# Altium PCB FAN_MOTOR_PCB.PcbDoc
Units mil, origin at the board's own origin, x right, y up, seen from the top; angles counter-clockwise.
Board outline 1140 x 1745 mil, 2 copper layers (Top Layer, Bottom Layer); 26 components, 13 nets, 79 pads, 93 vias.
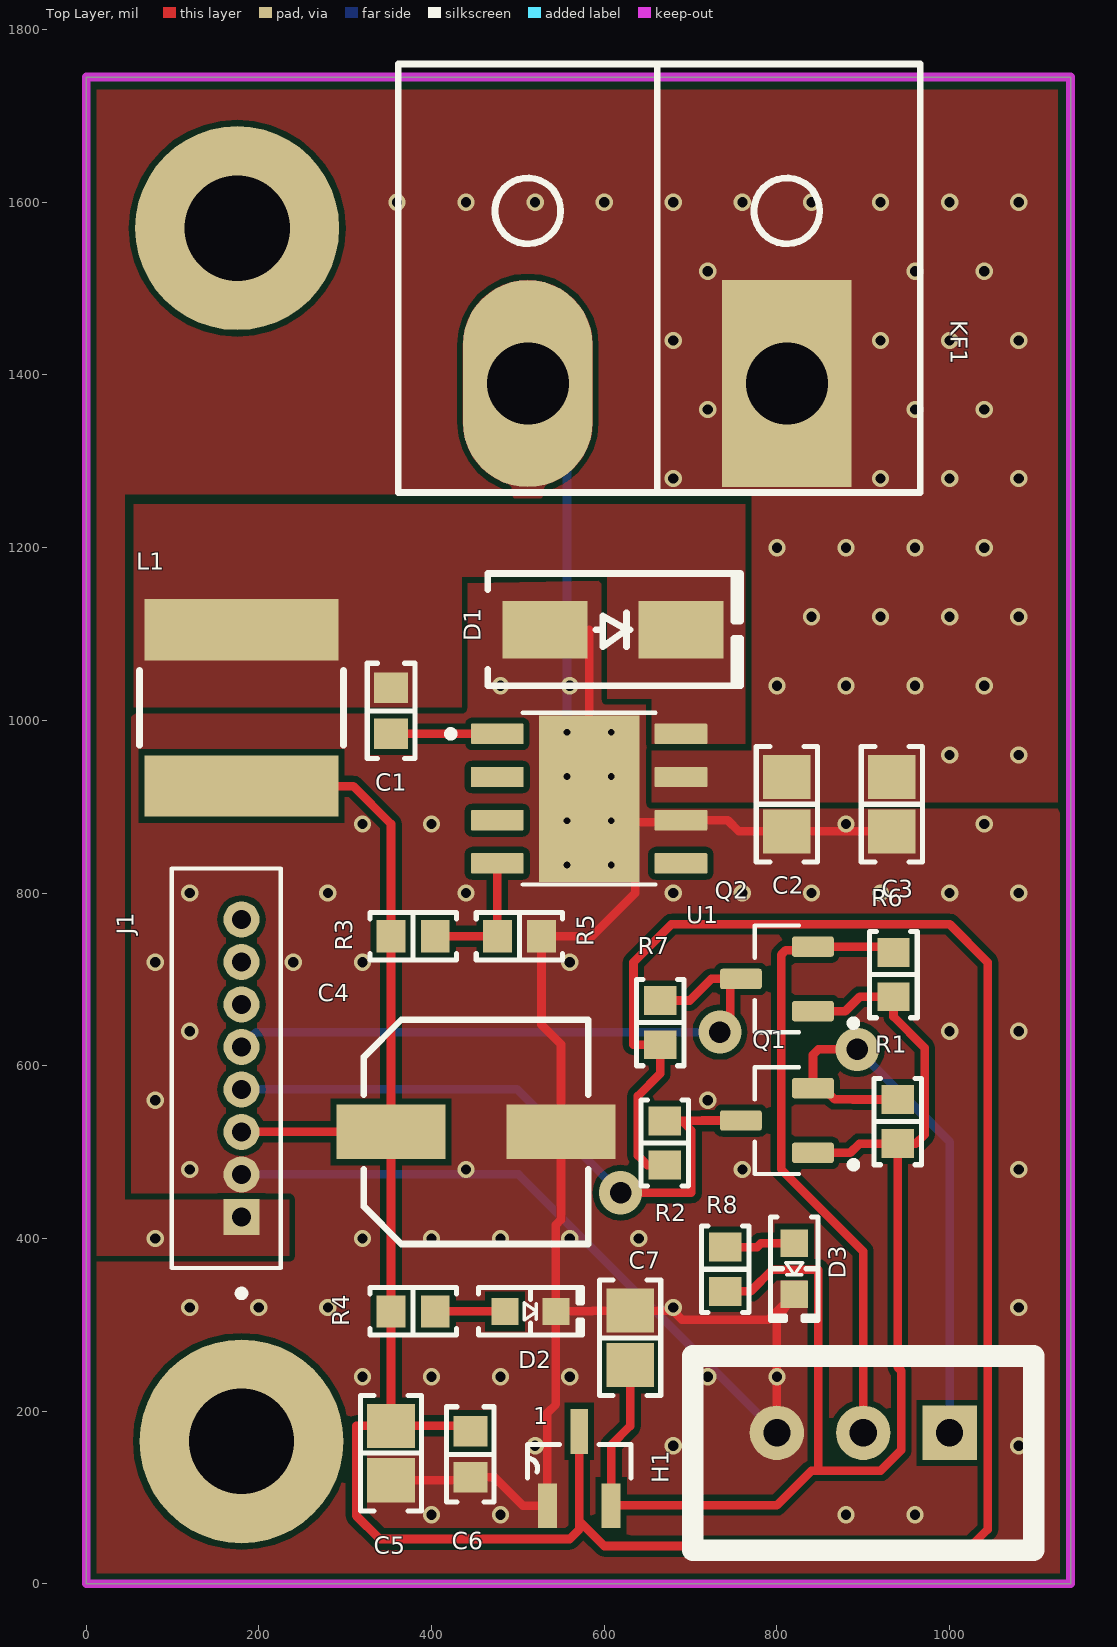
[diagram p0: Top Layer view]
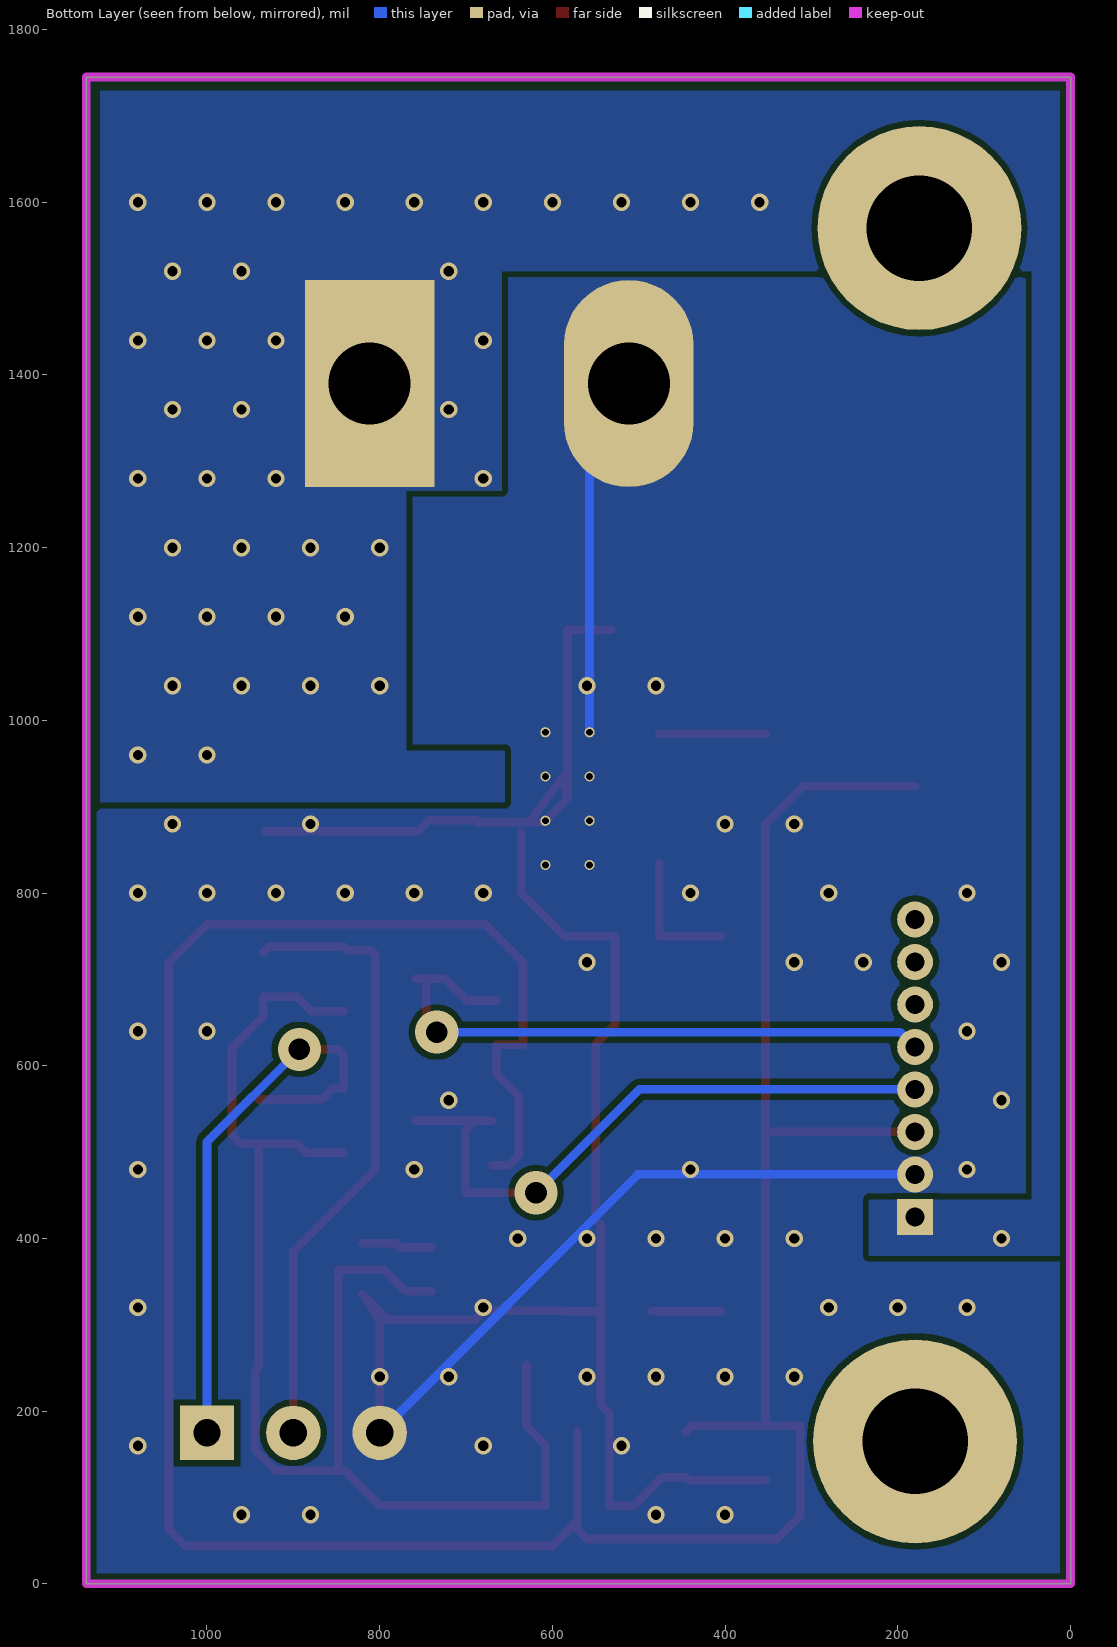
[diagram p1: Bottom Layer view, seen from below]
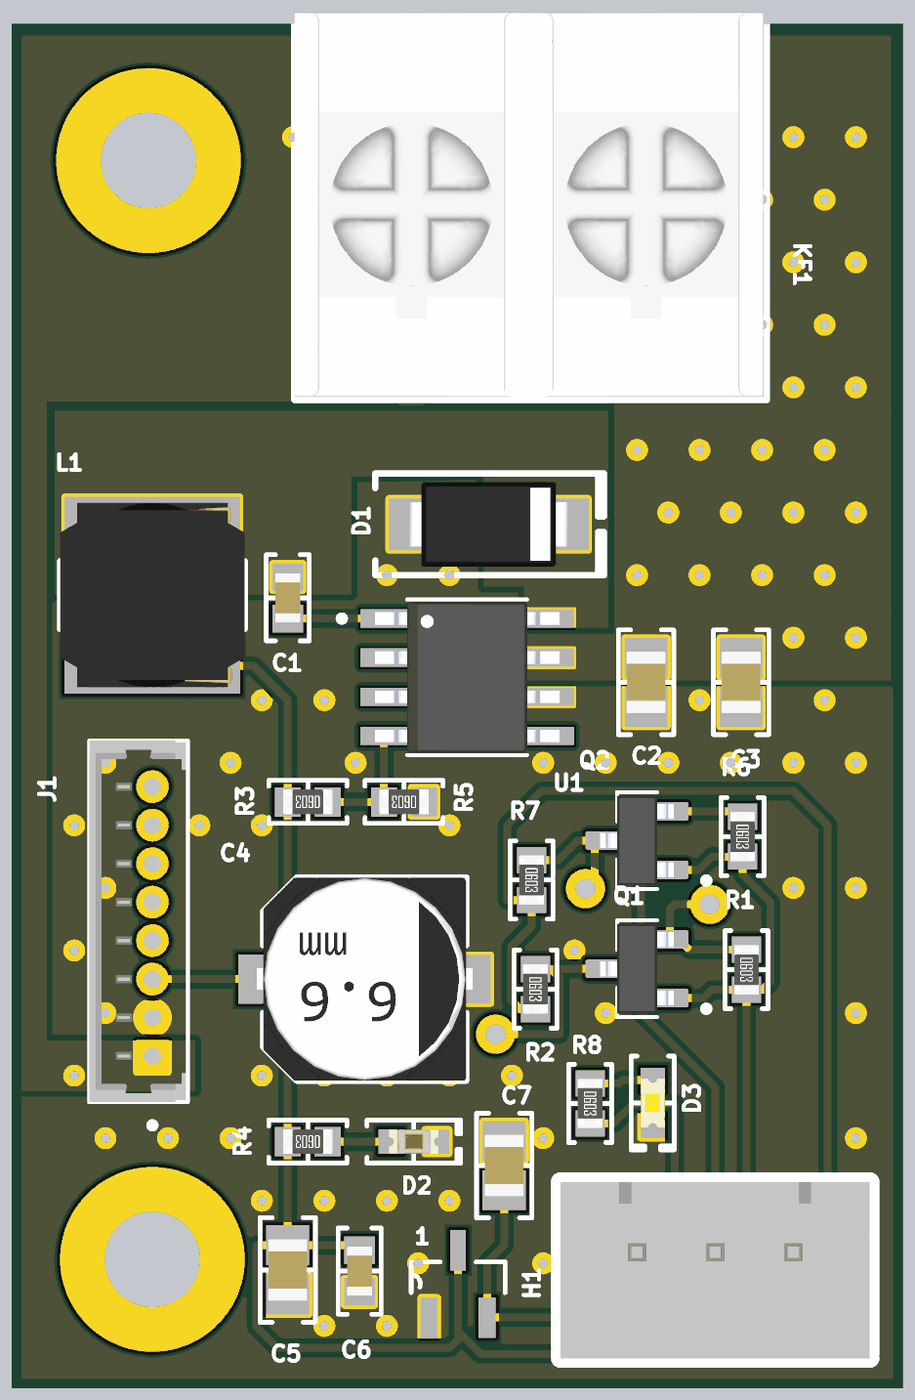
[diagram p2: 3D render of the assembled board from above, using the file's embedded part models]

## Layer stack, top to bottom
Top Solder: solder mask 0.4, Solder Resist, Dk 3.5
Top Layer: signal copper 1.4
Dielectric 1: dielectric 12.6, FR-4, Dk 4.8
Bottom Layer: signal copper 1.4
Bottom Solder: solder mask 0.4, Solder Resist, Dk 3.5

## Board outline
0,0 1140,0 1140,1745 0,1745

## Design rules (kind name [scope] priority, off if disabled: settings)
Clearance [All] p1: gap=7 ignorepadtopadclearanceinfootprint=FALSE
PolygonConnect PolygonConnect_4 [All vs IsNamedPolygon('GND_L01_P005') Or IsNamedPolygon('GND_L02_P006')] p1: connectstyle=Direct reliefconductorwidth=10 reliefentries=4 polygonreliefangle="90 Angle" airgapwidth=10
PolygonConnect PolygonConnect_3 [All vs IsNamedPolygon('NETC1_1_L01_P004')] p2: connectstyle=Direct reliefconductorwidth=10 reliefentries=4 polygonreliefangle="90 Angle" airgapwidth=10
PolygonConnect PolygonConnect_2 [All vs IsNamedPolygon('+25_L02_P002') Or IsNamedPolygon('+25_L02_P003')] p3: connectstyle=Direct reliefconductorwidth=10 reliefentries=4 polygonreliefangle="90 Angle" airgapwidth=10
PolygonConnect PolygonConnect_1 [All vs IsNamedPolygon('+25_L01_P000') Or IsNamedPolygon('+25_L01_P001')] p4: connectstyle=Direct reliefconductorwidth=10 reliefentries=4 polygonreliefangle="90 Angle" airgapwidth=10
PolygonConnect [All] p5: connectstyle=Relief reliefconductorwidth=10 reliefentries=4 polygonreliefangle="90 Angle" airgapwidth=10
RoutingVias [All] p1: holewidth=25 width=50 viastyle="Through Hole" minholewidth=10 minwidth=20 maxholewidth=28 maxwidth=50
SolderMaskExpansion [All] p1: expansion=4 istentingtop=FALSE
Width [All] p1: maxlimit=10 minlimit=10 preferedwidth=10
30 further rules are at their usual default settings.

## Components (designator, comment, footprint, x,y, rotation, side; value= is the part's Value field where it differs from the comment)
1 "MCP1700T-3302E/TT" SOT95P237X112-3N 571.15,133.57 r90 top
C1 "10000 pF" "CAP 0603_1608" 353.15,1010.98 r270 top
C2 "4.7 µF" "CAP 0805_2012" 811.53,902.91 r90 top
C3 "4.7 µF" "CAP 0805_2012" 933.15,902.91 r90 top
C4 "220 µF" "CAP ALSMD 6.6MM H6.1MM" 451.57,523.43 r0 top
C5 "10 µF" "CAP 0805_2012" 353.15,151.5 r90 top
C6 "0.1µF" "CAP 0603_1608" 445,150 r90 top
C7 "10 µF" "CAP 0805_2012" 630,285 r270 top
D1 "SS34-HF" "DO214AC SMA" 610.12,1105 r0 top
D2 "Red" "LED 0603_1608 RED" 514.53,315.59 r0 top
D3 "Yellow" "LED 0603_1608 YELLOW" 820,365 r270 top
H1 "Header 3P 2.54 Duc Thang" XH2.54M-3 1000,175 r180 top
J1 "0530470810" MOLEX_0530470810 162.28,597.24 r90 top
KF1 "CON 2 KF7.62" "CON 2 KF7.62" 809.53,1390 r180 top
L1 "22 µH" "WURTH WE-LQS 6045" 180,1014.45 r270 top
Q1 "BSS138" SOT95P240X111-3N 800,536.61 r180 top
Q2 "BSS138" SOT95P240X111-3N 800,700.59 r180 top
R1 "10 kOhms" "RES 0603_1608" 940,535.43 r270 top
R2 "10 kOhms" "RES 0603_1608" 670,510.59 r270 top
R3 "10.2 kOhms" "RES 0603_1608" 378.74,750 r180 top
R4 "680 Ohms" "RES 0603_1608" 378.74,315.59 r180 top
R5 "3.3 kOhms" "RES 0603_1608" 501.85,750 r180 top
R6 "10 kOhms" "RES 0603_1608" 935,705.59 r270 top
R7 "10 kOhms" "RES 0603_1608" 665,650 r270 top
R8 "680 Ohms" "RES 0603_1608" 740,364.41 r270 top
U1 "TPS5430DDAR" CONV_TPS5430DDAR 582.56,909.41 r0 top

## Footprints (in the part's own frame and the unit in brackets; to place one, negate y for a bottom-side part, rotate by r counter-clockwise, add the part's x,y. Pads: shape width x height; smd on the part's side, far side on the other; paste and mask are expansions set on the pad)
"CAP 0603_1608" [mm] "Chip Capacitor, 2-Leads, Body 1.60x0.80mm, IPC Medium Density"
  rect 0.9x1 smd: 1(-0.675,0) 2(0.675,0)
  silkscreen extent -1.4,-0.7 1.4,0.7, body extent -0.8,-0.41 0.8,0.41, height 0.82
"CAP 0805_2012" [mm] "Chip Capacitor, 2-Leads, Body 2.00x1.20mm, IPC Medium Density"
  rect 1.3x1.4 smd: 1(-0.8,0) 2(0.8,0)
  silkscreen extent -1.7,-0.9 1.7,0.9, body extent -1,-0.64 1,0.64, height 1.26
"CAP ALSMD 6.6MM H6.1MM" [mm] "Aluminum Electrolytic Capacitor, Body 6.60x6.60x6.10mm, IPC Low Density"
  rect 3.2x1.6 smd: 1(-2.5,0) 2(2.5,0)
  silkscreen extent -3.3,-3.3 3.3,3.3, body extent -3.5,-3.3 3.5,3.3, height 6.1
"CON 2 KF7.62" [mil]
  rect 150x240 hole 95: 1(-2,0)
  oval 150x240 hole 95: 2(298,0)
  silkscreen extent -157,-370 448,126, body extent -152,-370 448,122, height 493
CONV_TPS5430DDAR [mm]
  rrect10% 1.55x0.6 smd mask+0: 1(-2.7,1.905) 2(-2.7,0.635) 3(-2.7,-0.635) 4(-2.7,-1.905) 5(2.7,-1.905) 6(2.7,-0.635) 7(2.7,0.635) 8(2.7,1.905)
  rect 2.95x4.9 smd paste-3 mask+0: 9(0,0)
  round 0.3 hole 0.2 mask+0: 10(-0.65,1.95) 11(0.65,1.95) 12(-0.65,0.65) 13(0.65,0.65) 14(-0.65,-0.65) 15(0.65,-0.65) 16(-0.65,-1.95) 17(0.65,-1.95)
  silkscreen extent -4.17,-2.52 1.95,2.52, body extent -3,-2.45 3,2.45, height 1.7
"DO214AC SMA" [mm] "Molded Diode, 2-Leads, Body 4.30x2.60mm, IPC Medium Density"
  rect 2.5x1.7 smd: 1(-2,0) 2(2,0)
  silkscreen extent -3.68,-1.65 3.75,1.65, body extent -2.6,-1.37 2.6,1.37, height 2.4
"LED 0603_1608 RED" [mm] "Chip Diode, 2-Leads, Body 1.60x0.80mm, IPC Medium Density"
  rect 0.8x0.8 smd: 1(-0.75,0) 2(0.75,0)
  silkscreen extent -1.52,-0.7 1.52,0.7, body extent -0.8,-0.4 0.8,0.4, height 0.53
"LED 0603_1608 YELLOW" [mm] "Chip Diode, 2-Leads, Body 1.60x0.80mm, IPC Medium Density"
  rect 0.8x0.8 smd: 1(-0.75,0) 2(0.75,0)
  silkscreen extent -1.52,-0.7 1.52,0.7, body extent -0.8,-0.4 0.8,0.4, height 0.53
MOLEX_0530470810 [mm]
  rect 1.058x1.058 hole 0.55: 1(-4.375,-0.45)
  round 1.058 hole 0.55: 2(-3.125,-0.45) 3(-1.875,-0.45) 4(-0.625,-0.45) 5(0.625,-0.45) 6(1.875,-0.45) 7(3.125,-0.45) 8(4.375,-0.45)
  silkscreen extent -6.72,-1.6 5.88,1.6, body extent -5.87,-1.6 5.87,1.6, height 0.97
"RES 0603_1608" [mm] "Chip Resistor, 2-Leads, Body 1.60x0.80mm, IPC Medium Density"
  rect 0.85x0.95 smd: 1(-0.65,0) 2(0.65,0)
  silkscreen extent -1.27,-0.7 1.27,0.7, body extent -0.8,-0.4 0.8,0.4, height 0.45
SOT95P237X112-3N [mil]
  rect 52x22 smd: 1(-43,37) 2(-43,-37)
  rect 52x20 smd: 3(43,0)
  silkscreen extent -11,-60 28,60
SOT95P240X111-3N [mm]
  rrect25% 1.23x0.6 smd: 1(-1.06,0.95) 2(-1.06,-0.95) 3(1.06,0)
  silkscreen extent -2.35,-1.57 0.65,1.57, body extent -1.2,-1.46 1.2,1.46, height 1.2
"WURTH WE-LQS 6045" [mm] "SMD Power Inductor, 2-Leads, body 6x6mm"
  rect 1.8x5.7 smd: 1(-2.3,0) 2(2.3,0)
  silkscreen extent -1.1,-3 1.1,3, body extent -3,-3 3,3, height 4.5
XH2.54M-3 [mm]
  rect 1.6x1.6 hole 0.8: 1(0,0)
  round 1.6 hole 0.8: 2(2.54,0) 3(5.08,0)
  silkscreen extent -2.48,-2.26 7.56,3.46, body extent -2.48,-2.26 7.56,3.48, height 6.91

## Part data
1: "Linear Voltage Regulator IC 1 Output 250mA SOT-23-3", Package="SOT-23-3 Microchip", Availability=Unavailable, MF=Microchip, MP=MCP1700T-3302E/TT, Price=None, SnapEDA_Link=https://www.snapeda.com/parts/MCP1700T-3302E/TT/Microchip/view-part/50877/?ref=snap
C1: library part C0603C103K4RECAUTO, "CAP CER 0603 10NF 16V X7R 10%", Device Package="0603 (1608 Metric)", Manufacturer=KEMET, Operating Temperature="-55°C ~ 125°C", Ratings=AEC-Q200, Supplier Part Number 1=399-17880-1-ND, Temperature Coefficient=X7R, Tolerance=±10%, Voltage - Rated=16V, Applications="Automotive, ESD Protection", Capacitance="10000 pF", componentlink1description=Datasheet, componentlink1url=https://api.kemet.com/component-edge/download/datasheet/C0603C103K4RECAUTO.pdf, componentlink2description="DigiKey Link", componentlink2url=https://www.digikey.com/en/products/detail/kemet/C0603C103K4RECAUTO/8640474, lastupdated="2/9/2024 8:10:22 PM", Lifecycle Status=Active, Minimum Order=1, Mounting Type="Surface Mount, MLCC", Package / Case="0603 (1608 Metric)", packaging=TapeAndReel, Part Number=C0603C103K4RECAUTO, Part Status=Active, partid=8251, Price=0.01, series="ESD SMD Auto X7R", Size / Dimension="0.063\" L x 0.031\" W (1.60mm x 0.80mm)", Supplier 1=DigiKey, Thickness (Max)="0.034\" (0.87mm)"
C2 C3: library part KGM21AR71E475KU, "CAP CER 4.7UF 25V X7R 0805", Device Package="0805 (2012 Metric)", Manufacturer="KYOCERA AVX", Operating Temperature="-55°C ~ 125°C", Supplier Part Number 1=478-KGM21AR71E475KUCT-ND, Temperature Coefficient=X7R, Tolerance=±10%, Voltage - Rated=25V, Applications="General Purpose", Capacitance="4.7 µF", componentlink1description=Datasheet, componentlink1url=https://datasheets.kyocera-avx.com/X7RDielectric.pdf, componentlink2description="DigiKey Link", componentlink2url=https://www.digikey.com/en/products/detail/kyocera-avx/KGM21AR71E475KU/6564250, lastupdated="2/9/2024 8:14:06 PM", Lifecycle Status=Active, Minimum Order=1, Mounting Type="Surface Mount, MLCC", Package / Case="0805 (2012 Metric)", packaging=TapeAndReel, Part Number=KGM21AR71E475KU, Part Status=Active, partid=53884, Price=0.12, series="KGM - X7R", Size / Dimension="0.079\" L x 0.049\" W (2.01mm x 1.25mm)", Supplier 1=DigiKey, Thickness (Max)="0.057\" (1.45mm)"
C4: library part EEE-FT1A221AL, "CAP ALUM 220UF 20% 10V SMD", ESR (Equivalent Series Resistance)="260mOhm @ 100kHz", Lifetime @ Temp.="2000 Hrs @ 105°C", Manufacturer="Panasonic Electronic Components", Operating Temperature="-55°C ~ 105°C", Ratings=AEC-Q200, Ripple Current @ High Frequency="300 mA @ 100 kHz", Ripple Current @ Low Frequency="195 mA @ 120 Hz", Supplier Part Number 1=10-EEE-FT1A221ALCT-ND, Tolerance=±20%, Voltage - Rated="10 V", Applications=Automotive, Capacitance="220 µF", componentlink1description=Datasheet, componentlink1url=https://na.industrial.panasonic.com/file-download/19625, componentlink2description="DigiKey Link", componentlink2url=https://www.digikey.com/en/products/detail/panasonic-electronic-components/EEE-FT1A221AL/12459675, Height - Seated (Max)="0.240\" (6.10mm)", lastupdated="6/3/2024 8:16:08 PM", Lifecycle Status=Active, Minimum Order=1, Mounting Type="Surface Mount", packaging=TapeAndReel, Part Number=EEE-FT1A221AL, Part Status=Active, partid=27865, Polarization=Polar, Price=0.16, series="FT, Halogen Free", Size / Dimension="0.248\" Dia (6.30mm)", Supplier 1=DigiKey, Surface Mount Land Size="0.260\" L x 0.260\" W (6.60mm x 6.60mm)"
C5 C7: library part C2012X6S1C106K125AC, "CAP CER 10UF 16V X6S 0805", Device Package="0805 (2012 Metric)", Manufacturer="TDK Corporation", Operating Temperature="-55°C ~ 105°C", Supplier Part Number 1=445-7611-1-ND, Temperature Coefficient=X6S, Tolerance=±10%, Voltage - Rated=16V, Applications="General Purpose", Capacitance="10 µF", componentlink1description=Datasheet, componentlink1url=https://product.tdk.com/info/en/catalog/datasheets/mlcc_commercial_general_en.pdf?ref_disty=digikey, componentlink2description="DigiKey Link", componentlink2url=https://www.digikey.com/en/products/detail/tdk-corporation/C2012X6S1C106K125AC/2733046, Features="Low ESL", lastupdated="2/9/2024 8:16:08 PM", Lifecycle Status=Active, Minimum Order=1, Mounting Type="Surface Mount, MLCC", Package / Case="0805 (2012 Metric)", packaging=TapeAndReel, Part Number=C2012X6S1C106K125AC, Part Status=Active, partid=2995, Price=0.06, series=C, Size / Dimension="0.079\" L x 0.049\" W (2.00mm x 1.25mm)", Supplier 1=DigiKey, Thickness (Max)="0.057\" (1.45mm)"
C6: library part 0603YC104K4T4A, "CAP CER 0.1UF 16V X7R 0603", Device Package="0603 (1608 Metric)", Manufacturer="AVX Corporation", Operating Temperature="-55°C ~ 125°C", Ratings=AEC-Q200, Supplier Part Number 1=478-9382-1-ND, Temperature Coefficient=X7R, Tolerance=±10%, Voltage - Rated=16V, Applications=Automotive, Capacitance=0.1µF, componentlink1description=Datasheet, componentlink1url=http://datasheets.avx.com/AutoMLCC.pdf, componentlink2description="DigiKey Link", componentlink2url=http://digikey.com/product-detail/en/avx-corporation/0603YC104K4T4A/478-9382-1-ND/4901449, lastupdated="9/2/2020 1:03:04 AM", Lifecycle Status=Active, Minimum Order=1, Mounting Type="Surface Mount, MLCC", Package / Case="0603 (1608 Metric)", packaging=TapeAndReel, Part Number=0603YC104K4T4A, Part Status=Active, partid=17140, Price=0.02, series=-, Size / Dimension="0.063\" L x 0.032\" W (1.60mm x 0.81mm)", Supplier 1=DigiKey, Thickness (Max)="0.035\" (0.90mm)"
D1: "DIODE SCHOTTKY 40V 3A DO214AC", Capacitance @ Vr, F="450pF @ 4V, 1MHz", Current - Average Rectified (Io)=3A, Current - Reverse Leakage @ Vr="500 µA @ 40 V", Manufacturer="Comchip Technology", Operating Temperature - Junction="-55°C ~ 125°C", Package / Case="DO-214AC, SMA", Supplier Device Package="DO-214AC (SMA)", Supplier Part Number 1=641-2115-1-ND, Voltage - DC Reverse (Vr) (Max)="40 V", Voltage - Forward (Vf) (Max) @ If="550 mV @ 3 A", componentlink1description=Datasheet, componentlink1url=http://www.comchiptech.com/admin/files/product/20190514101641.pdf, componentlink2description="DigiKey Link", componentlink2url=https://www.digikey.com/en/products/detail/comchip-technology/SS34-HF/10279693, Diode Type=Schottky, lastupdated="6/3/2024 7:54:30 PM", Lifecycle Status=Active, Minimum Order=1, Mounting Type="Surface Mount", packaging=TapeAndReel, Part Number=SS34-HF, Part Status=Active, partid=2138, Price=0.07, series=-, Speed="Fast Recovery =< 500ns, > 200mA (Io)", Supplier 1=DigiKey
D2: library part CSL1901VW1, "LED RED DIFFUSED 0603 SMD", Current - Test=2mA, Device Package="0603 (1608 Metric)", Lens Color=White, Manufacturer="Rohm Semiconductor", Millicandela Rating=4.8mcd, Supplier Device Package=0603, Supplier Part Number 1=846-CSL1901VW1CT-ND, Voltage - Forward (Vf) (Typ)=1.8V, Color=Red, componentlink1description=Datasheet, componentlink1url=https://fscdn.rohm.com/en/products/databook/datasheet/opto/led/chip_mono/csl1901vw1-e.pdf, componentlink2description="DigiKey Link", componentlink2url=https://www.digikey.com/en/products/detail/rohm-semiconductor/CSL1901VW1/16685589, Height (Max)=0.65mm, lastupdated="6/3/2024 7:59:44 PM", Lens Size="1.10mm x 0.80mm", Lens Style="Rectangle with Flat Top", Lens Transparency=Diffused, Lifecycle Status=Active, Minimum Order=1, Mounting Type="Surface Mount", Package / Case="0603 (1608 Metric)", packaging=TapeAndReel, Part Number=CSL1901VW1, Part Status=Active, partid=1213, Price=0.10, series=-, Size / Dimension="1.60mm L x 0.80mm W", Supplier 1=DigiKey, Wavelength - Dominant=630nm
D3: library part IN-S63AT5Y, "LED YELLOW CLEAR 0603 SMD", Current - Test=5mA, Device Package="0603 (1608 Metric)", Lens Color=Clear, Manufacturer=Inolux, Millicandela Rating=35mcd, Supplier Device Package=0603, Supplier Part Number 1=1830-1066-1-ND, Voltage - Forward (Vf) (Typ)=2V, Color=Yellow, componentlink1description=Datasheet, componentlink1url=http://www.inolux-corp.com/datasheet/SMDLED/Mono%20Color%20Top%20View/IN-S63AT%20Series_V1.1.pdf, componentlink2description="DigiKey Link", componentlink2url=https://www.digikey.com/en/products/detail/inolux/IN-S63AT5Y/7604932, Configuration=Standard, Height (Max)=0.40mm, lastupdated="6/3/2024 8:01:09 PM", Lens Size="1.15mm x 0.80mm", Lens Style="Rectangle with Flat Top", Lens Transparency=Clear, Lifecycle Status=Active, Minimum Order=1, Mounting Type="Surface Mount", Package / Case="0603 (1608 Metric)", packaging=TapeAndReel, Part Number=IN-S63AT5Y, Part Status=Active, partid=143, Price=0.03, series=IN-S63AT, Size / Dimension="1.60mm L x 0.80mm W", Supplier 1=DigiKey, Viewing Angle=120°, Wavelength - Dominant=589nm, Wavelength - Peak=593nm
H1 KF1: "Cắm", Chung_Loai=Cắm, Don_Vi=Con
  H1: Ma_Hang=MH001292, Ten_Linh_Kien="Header 3P XH2.54-3P Đực Thẳng"
  KF1: Ma_Hang=MH002053, Ten_Linh_Kien="CON 2 KF7.62-2P 7.62MM (Đen Thẳng)"
J1: "Picoblade Connector, 8 Circuit Single Row, Vertical Throughole PCB", Package=None, Availability="In Stock", Check_prices=https://www.snapeda.com/parts/0530470810/Molex/view-part/?ref=eda, MF=Molex, MP=0530470810, Price=None, Purchase-URL=https://pricing.snapeda.com/search/part/0530470810/?ref=eda, SnapEDA_Link=https://www.snapeda.com/parts/0530470810/Molex/view-part/?ref=snap
L1: library part 74404064220, "FIXED IND 22UH 1.8A 89 MOHM SMD", Current - Saturation=2.2A, Current Rating (Amps)="1.8 A", DC Resistance (DCR)=89mOhm, Device Package=Nonstandard, Frequency - Self Resonant=15MHz, Inductance Frequency - Test="100 kHz", Manufacturer="Würth Elektronik", Operating Temperature="-40°C ~ 125°C", Ratings=AEC-Q200, Supplier Device Package=6045, Supplier Part Number 1=732-5554-1-ND, Tolerance=±20%, componentlink1description=Datasheet, componentlink1url=https://katalog.we-online.de/pbs/datasheet/74404064220.pdf, componentlink2description="DigiKey Link", componentlink2url=https://www.digikey.com/en/products/detail/würth-elektronik/74404064220/4865699, Height - Seated (Max)="0.177\" (4.50mm)", Inductance="22 µH", lastupdated="6/3/2024 8:27:17 PM", Lifecycle Status=Active, Material - Core=Ferrite, Minimum Order=1, Mounting Type="Surface Mount", Package / Case=Nonstandard, packaging=TapeAndReel, Part Number=74404064220, Part Status=Active, partid=3707, Price=0.74, series=WE-LQS, Shielding=Shielded, Size / Dimension="0.236\" L x 0.236\" W (6.00mm x 6.00mm)", Supplier 1=DigiKey, Type="Drum Core, Wirewound"
Q1 Q2: "N-Channel 50 V 220mA (Ta) 350mW (Ta) Surface Mount SOT-23-3", Package="SOT-23-3 Motorola", Check_prices=https://www.snapeda.com/parts/BSS138/Onsemi/view-part/?ref=eda, MF=onsemi, MP=BSS138, SnapEDA_Link=https://www.snapeda.com/parts/BSS138/Onsemi/view-part/?ref=snap
R1 R2 R6 R7: library part MCT06030D1002BP100, "RES SMD 10K OHM 0.1% 1/10W 0603", Device Package="0603 (1608 Metric)", Manufacturer="Vishay Beyschlag", Operating Temperature="-55°C ~ 125°C", Power (Watts)="0.1W, 1/10W", Supplier Device Package=0603, Supplier Part Number 1=749-1694-1-ND, Temperature Coefficient=±25ppm/°C, Tolerance=±0.1%, componentlink1description=Datasheet, componentlink1url=http://www.vishay.com/docs/28700/mcx0x0xpre.pdf, componentlink2description="DigiKey Link", componentlink2url=http://digikey.com/product-detail/en/vishay-beyschlag/MCT06030D1002BP100/749-1694-1-ND/7348002, Composition="Thin Film", Features=Anti-Sulfur, Height - Seated (Max)="0.022\" (0.55mm)", lastupdated="2/9/2024 8:42:52 PM", Lifecycle Status=Active, Minimum Order=1, Number of Terminations=2, Package / Case="0603 (1608 Metric)", packaging=TapeAndReel, Part Number=MCT06030D1002BP100, Part Status=Active, partid=16306, Price=0.17, Resistance="10 kOhms", series="MCT - Precision", Size / Dimension="0.061\" L x 0.033\" W (1.55mm x 0.85mm)", Supplier 1=DigiKey
R3: library part CPF0603B10K2E1, "RES SMD 10.2KOHM 0.1% 1/16W 0603", Device Package="0603 (1608 Metric)", Manufacturer="TE Connectivity Passive Product", Operating Temperature="-55°C ~ 155°C", Power (Watts)="0.063W, 1/16W", Supplier Device Package=0603, Supplier Part Number 1=1712-CPF0603B10K2E1CT-ND, Temperature Coefficient=±25ppm/°C, Tolerance=±0.1%, componentlink1description=Datasheet, componentlink1url=https://www.te.com/commerce/DocumentDelivery/DDEController?Action=srchrtrv&DocNm=1773200&DocType=DS&DocLang=English, componentlink2description="DigiKey Link", componentlink2url=https://www.digikey.com/en/products/detail/te-connectivity-passive-product/CPF0603B10K2E1/2382892, Composition="Thin Film", Height - Seated (Max)="0.022\" (0.55mm)", lastupdated="2/9/2024 8:40:48 PM", Lifecycle Status=Active, Minimum Order=1, Number of Terminations=2, Package / Case="0603 (1608 Metric)", packaging=TapeAndReel, Part Number=CPF0603B10K2E1, Part Status=Active, partid=75561, Price=0.12, Resistance="10.2 kOhms", series="CPF, Neohm", Size / Dimension="0.061\" L x 0.031\" W (1.55mm x 0.80mm)", Supplier 1=DigiKey
R4 R8: library part CRCW0603680RFKEAHP, "RES SMD 680 OHM 1% 1/3W 0603", Device Package="0603 (1608 Metric)", Manufacturer="Vishay Dale", Operating Temperature="-55°C ~ 155°C", Power (Watts)="0.333W, 1/3W", Ratings=AEC-Q200, Supplier Device Package=0603, Supplier Part Number 1=541-680SCT-ND, Temperature Coefficient=±100ppm/°C, Tolerance=±1%, componentlink1description=Datasheet, componentlink1url=http://www.vishay.com/docs/20043/crcwhpe3.pdf, componentlink2description="DigiKey Link", componentlink2url=https://www.digikey.com/en/products/detail/vishay-dale/CRCW0603680RFKEAHP/2226161, Composition="Thick Film", Features="Automotive AEC-Q200, Pulse Withstanding", Height - Seated (Max)="0.022\" (0.55mm)", lastupdated="2/9/2024 8:42:58 PM", Lifecycle Status=Active, Minimum Order=1, Number of Terminations=2, Package / Case="0603 (1608 Metric)", packaging=TapeAndReel, Part Number=CRCW0603680RFKEAHP, Part Status=Active, partid=14793, Price=0.01, Resistance="680 Ohms", series=CRCW-HP, Size / Dimension="0.063\" L x 0.033\" W (1.60mm x 0.85mm)", Supplier 1=DigiKey
R5: library part ERJ-UP3J332V, "RES 3.3K OHM 5% 1/4W 0603", Device Package="0603 (1608 Metric)", Manufacturer="Panasonic Electronic Components", Operating Temperature="-55°C ~ 155°C", Power (Watts)="0.25W, 1/4W", Ratings=AEC-Q200, Supplier Device Package=0603, Supplier Part Number 1=10-ERJ-UP3J332VCT-ND, Temperature Coefficient=±200ppm/°C, Tolerance=±5%, componentlink1description=Datasheet, componentlink1url=https://b2b-api.panasonic.eu/file_stream/pids/fileversion/4484, componentlink2description="DigiKey Link", componentlink2url=https://www.digikey.com/en/products/detail/panasonic-electronic-components/ERJ-UP3J332V/12092604, Composition="Thick Film", Features="Anti-Sulfur, Automotive AEC-Q200, Pulse Withstanding", Height - Seated (Max)="0.022\" (0.55mm)", lastupdated="2/9/2024 8:41:35 PM", Lifecycle Status=Active, Minimum Order=1, Number of Terminations=2, Package / Case="0603 (1608 Metric)", packaging=TapeAndReel, Part Number=ERJ-UP3J332V, Part Status=Active, partid=63556, Price=0.02, Resistance="3.3 kOhms", series=ERJ-UP3, Size / Dimension="0.063\" L x 0.031\" W (1.60mm x 0.80mm)", Supplier 1=DigiKey
U1: "5.5V to 36V Input, 3A, 500kHz Step-Down Converter", Package="HSOIC-8 Texas Instruments", Availability="In Stock", Check_prices=https://www.snapeda.com/parts/TPS5430DDAR/Texas+Instruments/view-part/?ref=eda, MF="Texas Instruments", MP=TPS5430DDAR, Price=None, Purchase-URL=https://pricing.snapeda.com/search/part/TPS5430DDAR/?ref=eda, SnapEDA_Link=https://www.snapeda.com/parts/TPS5430DDAR/Texas+Instruments/view-part/?ref=snap

## Free pads (board coordinates)
  round 236.22 hole 122.05: 9(175,1570) 9(180,165)

## Via types
v1: diameter 20, hole 11.81, Top Layer to Bottom Layer, 90 vias
v2: diameter 50, hole 25, Top Layer to Bottom Layer, 3 vias

## Nets (pads, with @x,y where several pads share a name; then routed paths per layer and width w, separated by ;. In a path a pad name is that pad's centre, name@x,y a point inside that pad or via, vN(x,y) a via of type N, cw(c..) or ccw(c..) an arc to the next point about the centre after c; other vN are vias at no path point)
+3.3: 1.2 C7.2 Q1.1 Q2.1 R1.2 R6.2 R8.2 | length 1655.3
  Top Layer w10: 1.2 1.2@608.15,91 ; C7.2 630,182.85 608.15,161 1.2@608.15,91 ; R8.2 769.82,338.82 795,364 848,364 848,131 ; Q1.1 885,499.21 895.63,509.84 R1.2 ; Q2.1 879,663.19 895.81,680 R6.2 935,657 971,621 971,520 960.84,509.84 R1.2 ; 1.2@608.15,91 800,91 840,131 848,131 ; 848,131 920,131 944,155 944,247 940,251 R1.2
+5: 1.3 C4.1 C5.2 C6.2 J1.3 L1.2 R2.2 R3.2 R4.2 R7.2 | length 3585
  Top Layer w10: J1.3 C4.1 ; L1.2 309.25,923.9 353.15,880 R3.2 C4.1 ; C6.2 438.58,182.99 C5.2 ; 1.3 571.15,72.85 ; R2.2 650,485 639,496 639,565 665,591 R7.2 634,624.41 634,720 678,764 1000,764 1044,720 1044,63 1025,44 600,44 571.15,72.85 ; C5.2 313,182.99 313,79 340,52 560,52 571.15,63.15 571.15,72.85 ; C5.2 R4.2 C4.1
+25: C2.2 C3.2 J1.1 KF1.1 U1.7
  other v1: 80,400 1000,960 1080,960 800,1040 880,1040 960,1040 1040,1040 840,1120 920,1120 1000,1120 1080,1120 800,1200 880,1200 960,1200 1040,1200 680,1280 920,1280 1000,1280 1080,1280 720,1360 960,1360 1040,1360 680,1440 920,1440 1000,1440 1080,1440 720,1520 960,1520 1040,1520 360,1600 440,1600 520,1600 600,1600 680,1600 760,1600 840,1600 920,1600 1000,1600 1080,1600
Direct: J1.5 Q2.3 R7.1 | length 731.3
  Top Layer w10: R7.1 699,675.59 724,700.59 Q2.3@746,700.59 ; v2(734,639) 746,651 Q2.3@746,700.59 ; Q2.3 Q2.3@746,700.59
  Bottom Layer w10: J1.5 197.15,639 v2(734,639)
Direct_Sig: H1.2 Q2.2 R6.1 | length 729.7
  Top Layer w10: H1.2 900,385 805,480 805,728.73 810.24,733.97 837.71,733.97 Q2.2 928.19,737.99 R6.1
GND: 1.1 C2.1 C3.1 C4.2 C5.1 C6.1 C7.1 D1.1 D2.2 D3.2 H1.3 J1.2 KF1.2 R5.1 U1.6 U1.9 U1.10 U1.11 U1.12 U1.13 U1.14 U1.15 U1.16 U1.17 | length 3430.6
  Top Layer w10: C5.1 441.57,120 C6.1 473,123.43 505.85,90.57 1.1 534.15,198 544.06,207.91 D2.2 ; D1.1 582.56,1105 U1.9 ; U1.9@627.16,882.23 587.68,935 U1.9 ; U1.9@636,870.41 636,800 586,750 R5.1 527.44,647.56 550,625 C4.2 550,421.94 544.06,416 D2.2 ; H1.3 800,306 D3.2 790.53,306 690,306 679.5,316.5 C7.1 586.91,316.5 586,315.59 D2.2 ; C3.1 C2.1 755.99,871.42 743,884.41 U1.6 686.67,882.23 609.74,882.23 U1.9
  Bottom Layer w10: J1.2 500.79,474.21 H1.3 ; KF1.2 556.97,1390 U1.10
  other v1: 400,80 480,80 880,80 960,80 520,160 680,160 1080,160 320,240 400,240 480,240 560,240 720,240 800,240 120,320 200,320 280,320 680,320 1080,320 320,400 400,400 480,400 560,400 640,400 120,480 440,480 760,480 1080,480 80,560 720,560 120,640 1000,640 1080,640 80,720 240,720 320,720 560,720 120,800 280,800 440,800 680,800 760,800 840,800 920,800 1000,800 1080,800 320,880 400,880 880,880 1040,880 480,1040 560,1040
NetC1_1: C1.1 D1.2 L1.1 U1.8
NetC1_2: C1.2 U1.1 | length 123.1
  Top Layer w10: C1.2 U1.1
NetD2_1: D2.1 R4.1 | length 80.7
  Top Layer w10: R4.1 D2.1
NetD3_1: D3.1 R8.1 | length 81.9
  Top Layer w10: R8.1 777,390 781.53,394.53 D3.1
NetR3_1: R3.1 R5.2 U1.4 | length 156.3
  Top Layer w10: R3.1 R5.2 U1.4
PWM: J1.4 Q1.3 R2.1 | length 746.7
  Top Layer w10: v2(619,453) 701,453 701,525.18 690,536.18 ; R2.1 690,536.18 ; Q1.3 713.43,536.61 713,536.18 690,536.18
  Bottom Layer w10: J1.4 499.36,572.64 v2(619,453)
PWM_Sig: H1.1 Q1.2 R1.1 | length 684.7
  Top Layer w10: v2(892.98,619) 848,619 841.73,612.73 Q1.2 848,574.02 854.13,574.02 860.94,567.21 860.94,566.98 866.8,561.12 887.9,561.12 887.99,561.02 R1.1
  Bottom Layer w10: v2(892.98,619) 1000,511.98 H1.1
pads on no net: J1.6 J1.7 J1.8 U1.2 U1.3 U1.5

## Polygon pours and split planes (outlines as drawn)
+25 on Top Layer "+25_L01_P001" (solid, pour order 1): 235,380 235,445 45,445 45,1262 1125,1262 1125,1730 12,1730 12,380
GND on Top Layer "GND_L01_P005" (solid, pour order 5): 0,0 1140,0 1140,1745 0,1745
NetC1_1 on Top Layer "NETC1_1_L01_P004" (solid, pour order 4): 55,1015 435,1015 435,1165.77 603.55,1169 603.55,1024.96 655,1024.96 655,973 765,973 765,1015 765,1250 55,1250
+25 on Top Layer "+25_L01_P000" (solid, pour order 0): 660,1595 1125,1595 1125,905 885,905 655,905 655,965 770.58,965 770.58,1266.1 660,1266.1
GND on Bottom Layer "GND_L02_P006" (solid, pour order 6): 0,0 1140,0 1140,1745 0,1745
+25 on Bottom Layer "+25_L02_P003" (solid, pour order 3): 233.47,380 233.47,445 45,445 45,1520 1123.47,1520 1123.47,1729 10,1729 10,380
+25 on Bottom Layer "+25_L02_P002" (solid, pour order 2): 658.47,1525 1123.47,1525 1123.47,905 883.47,905 655,905 655,965 769.06,965 769.06,1266.1 658.47,1266.1

## Keep-outs
Keep-Out Layer:
  the board outline again, w10